# EAGLE board MOL-v1.8 (EAGLE 8.2.2)
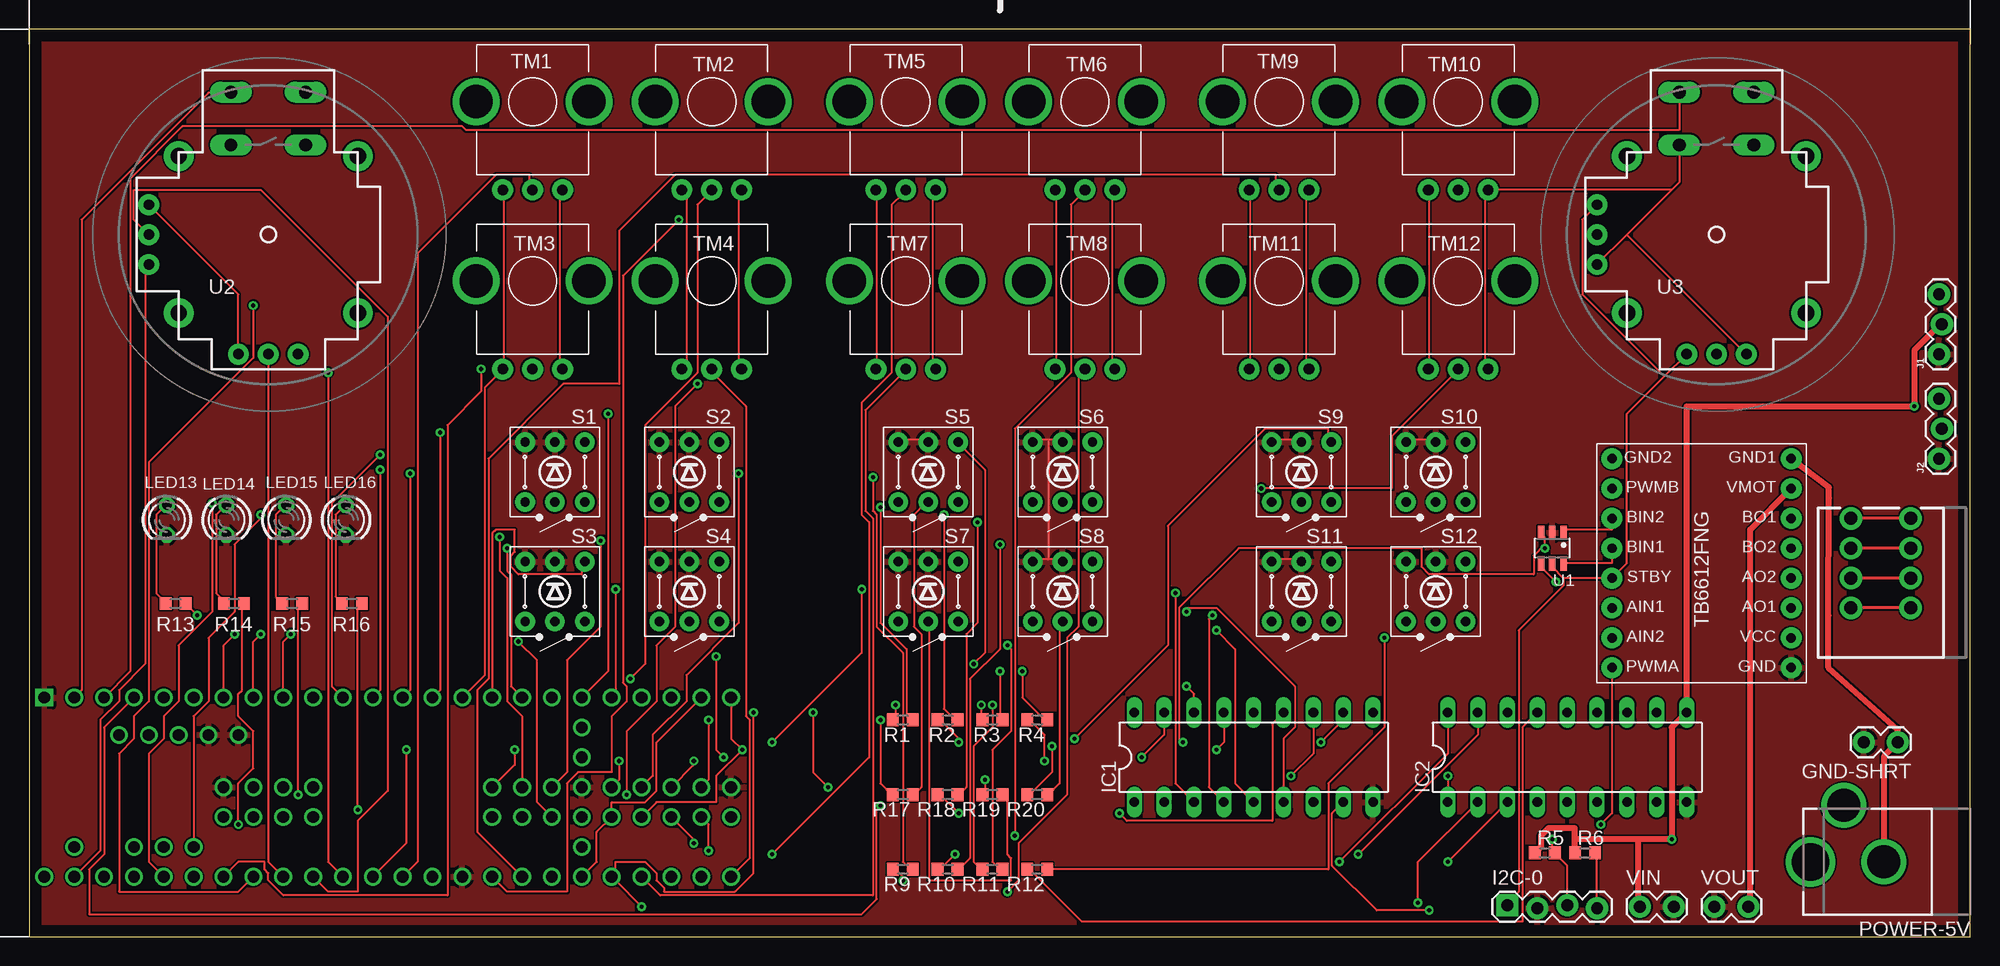
[diagram p0: board, top side]
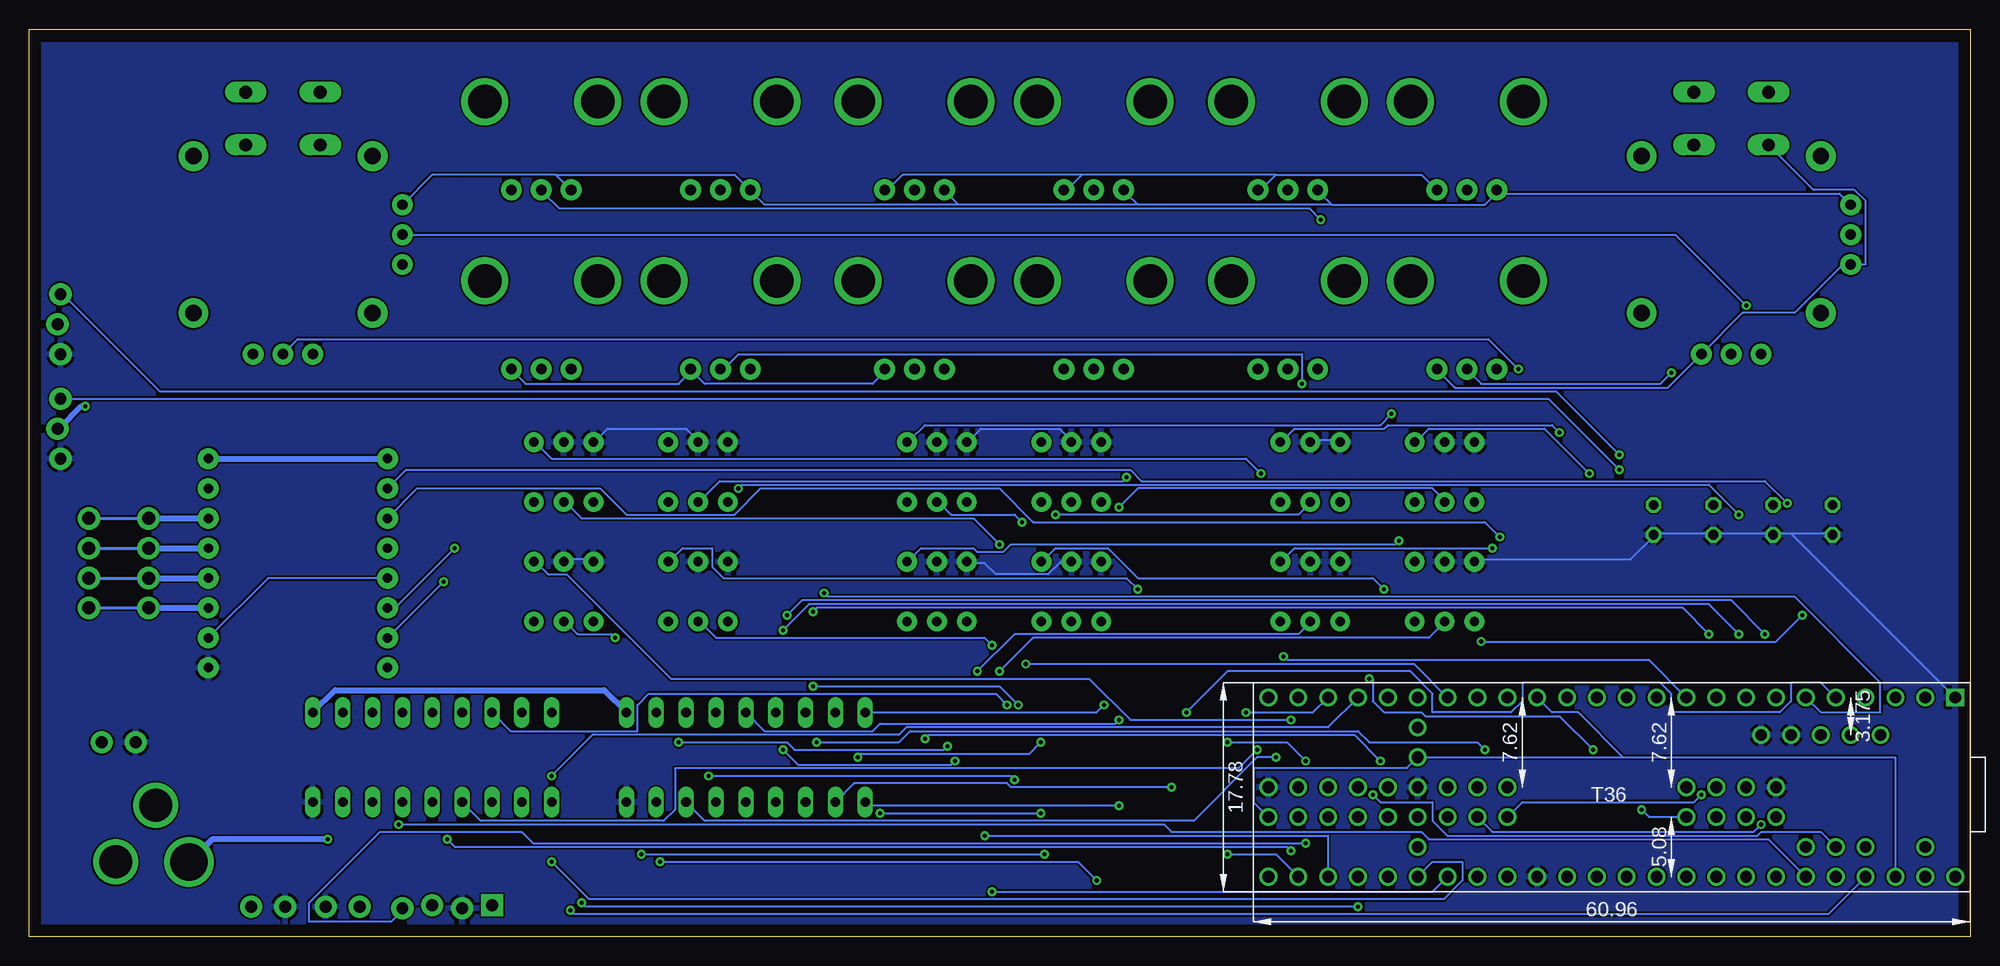
[diagram p1: board, bottom side, seen from below]

Size 165.08 x 77.14 mm. Coordinates in mm from the lower left corner, seen from the top.
Outline: 0,0 165.08,0 165.08,77.14 0,77.14 0,0
Copper layers (1*16): Top 0.035mm / dielectric 1.5mm / Bottom 0.035mm
Design rules "default": minimum track width 6mil, minimum drill 0.35mm, track to track 6mil, track to pad 6mil, pad to pad 6mil, via to via 6mil, smd to smd 6mil, copper to edge 40mil, drill to drill 6mil, minimum pad ring 10mil, minimum via ring 8mil, stop-mask expansion 4mil, vias tented up to drill 0mil, thermal gap 10mil
Net classes: 2 Power: width 0.508 mm, clearance 0.152 mm

## Footprints (pad centres in the part's own frame; a part is rotated, then mirrored left to right if it is on the bottom)
1X02_LOCK = drill 1.016 pad 1.88: 1 -0.178,0; 2 2.718,0
1X04_LOCK = drill 1.016 pad 1.88 square: 1 0,0.127 | drill 1.016 pad 1.88: 2 2.54,-0.127; 3 5.08,0.127; 4 7.62,-0.127
DIL18 = drill 0.813 long: 1 -10.16,-3.81; 2 -7.62,-3.81; 3 -5.08,-3.81; 4 -2.54,-3.81; 5 0,-3.81; 6 2.54,-3.81; 7 5.08,-3.81; 8 7.62,-3.81; 9 10.16,-3.81; 10 10.16,3.81; 11 7.62,3.81; 12 5.08,3.81; 13 2.54,3.81; 14 0,3.81; 15 -2.54,3.81; 16 -5.08,3.81; 17 -7.62,3.81; 18 -10.16,3.81
1X03_LOCK = drill 1.016 pad 1.88: 1 0,0.127; 2 2.54,-0.127; 3 5.08,0.127
LED3MM = drill 0.813 octagon: A -1.27,0; K 1.27,0
SPRINGTERMINAL-2.54MM-4 = drill 1.1 pad 1.9: 1 7.62,-2.54; 2 5.08,-2.54; 3 2.54,-2.54; 4 0,-2.54; P$1 7.62,2.54; P$2 5.08,2.54; P$3 2.54,2.54; P$4 0,2.54
DCJACK_2MM_PTH = drill 2.8: GND 0,7.35; GNDBREAK 4.8,10.75 | drill 3.2: PWR 0,13.6
R0603 = smd 1 x 1.1: 1 -0.85,0; 2 0.85,0
TR2-SWITCH-MOMENTARY-LED = drill 0.8 pad 1.676: 1 2.54,-2.54; 2 2.54,2.54; 3 -2.54,-2.54; 4 -2.54,2.54; A 0,2.54; C 0,-2.54
TRIM-PCB-9MM = drill 0.9 pad 1.778: 1 -2.54,-7.5; 2 0,-7.5; 3 2.54,-7.5 | drill 2.845 pad 4: 5 -4.8,0; 6 -4.8,0; M1 -4.8,0; M2 4.8,0
SOT23-6 = smd 0.55 x 1.2: 1 -0.95,-1.3; 2 0,-1.3; 3 0.95,-1.3; 4 0.95,1.3; 5 0,1.3; 6 -0.95,1.3
JOYSTICK = drill 1.1 pad 1.778 long: B1A -3.175,12.12; B1B 3.175,12.12; B2A -3.175,7.62; B2B 3.175,7.62 | drill 0.889 pad 1.778: H1 -2.54,-10.16; H2 0,-10.16; H3 2.54,-10.16; V1 -10.16,2.54; V2 -10.16,0; V3 -10.16,-2.54 | drill 1.397 pad 2.54: MOUNT1 -7.62,6.668; MOUNT2 -7.62,-6.668; MOUNT3 7.62,-6.668; MOUNT4 7.62,6.668
T36 = drill 1: 0 -15.24,-5.08; 1 -12.7,-5.08; 2 -10.16,-5.08; 3 -7.62,-5.08; 3V3(1) 17.78,-5.08; 3V3(2) 27.94,0; 3V3(3) -12.7,10.16; 3V3(4) 40.64,5.08; 4 -5.08,-5.08; 5 -2.54,-5.08; 5V -11.43,-1.905; 6 0,-5.08; 7 2.54,-5.08; 8 5.08,-5.08; 9 7.62,-5.08; 10 10.16,-5.08; 11 12.7,-5.08; 12 15.24,-5.08; 13 15.24,10.16; 14 12.7,10.16; 15 10.16,10.16; 16 7.62,10.16; 17 5.08,10.16; 18 2.54,10.16; 19 0,10.16; 20 -2.54,10.16; 21 -5.08,10.16; 22 -7.62,10.16; 23 -10.16,10.16; 24 20.32,-5.08; 25 22.86,-5.08; 26 25.4,-5.08; 27 27.94,-5.08; 28 30.48,-5.08; 29 33.02,-5.08; 30 35.56,-5.08; 31 38.1,-5.08; 32 40.64,-5.08; 33 40.64,10.16; 34 38.1,10.16; 35 35.56,10.16; 36 33.02,10.16; 37 30.48,10.16; 38 27.94,10.16; 39 25.4,10.16; 40 20.32,2.54; 41 22.86,2.54; 42 25.4,2.54; 43 30.48,2.54; 44 33.02,2.54; 45 35.56,2.54; 46 38.1,2.54; 47 38.1,5.08; 48 35.56,5.08; 49 33.02,5.08; 50 30.48,5.08; 51 25.4,5.08; 52 22.86,5.08; 53 20.32,5.08; 54 5.08,5.08; 55 2.54,5.08; 56 0,5.08; 57 -2.54,5.08; A10 -7.62,7.62; A11 -5.08,7.62; AGND -15.24,10.16; AREF -10.16,7.62; D+ -6.35,-1.905; D- -8.89,-1.905; DAC0 22.86,10.16; DAC1 20.32,10.16; DC 2.54,2.54; DD 5.08,2.54; DE 0,2.54; G1 27.94,2.54; G2 17.78,10.16; G3 40.64,2.54; G4 -3.81,-1.905; G5 -1.27,-1.905; G6 -2.54,2.54; P 27.94,5.08; R 27.94,7.62; VBAT 27.94,-2.54; VIN -17.78,10.16; VUSB -15.24,7.62 | drill 1 square: G0 -17.78,-5.08
POLOLU_TB6612FNG = drill 0.8 pad 1.778: AIN1 7.62,3.81; AIN2 7.62,6.35; AO1 -7.62,3.81; AO2 -7.62,1.27; BIN1 7.62,-1.27; BIN2 7.62,-3.81; BO1 -7.62,-3.81; BO2 -7.62,-1.27; GND -7.62,8.89; GND1 -7.62,-8.89; GND2 7.62,-8.89; PWMA 7.62,8.89; PWMB 7.62,-6.35; STBY 7.62,1.27; VCC -7.62,6.35; VMOT -7.62,-6.35

## Placement (x,y rotation side)
GND-SHRT  [1X02_LOCK]  158.75,16.51 180 top
I2C-0  [1X04_LOCK]  125.73,2.54 0 top
IC1  ULN2803  [DIL18]  104.14,15.24 0 top
IC2  ULN2803  [DIL18]  130.81,15.24 0 top
J1  SERVO 1  [1X03_LOCK]  162.56,49.53 90 top
J2  SERVO 2  [1X03_LOCK]  162.56,40.64 90 top
LED13  [LED3MM]  11.68,35.43 270 top
LED14  [LED3MM]  16.76,35.43 270 top
LED15  [LED3MM]  21.84,35.43 270 top
LED16  [LED3MM]  26.92,35.43 270 top
MOTORS1  [SPRINGTERMINAL-2.54MM-4]  157.48,27.94 90 top
POWER-5V  [DCJACK_2MM_PTH]  165.1,6.35 90 top
R1  [R0603]  74.3,18.41 180 top
R2  [R0603]  78.11,18.41 180 top
R3  [R0603]  81.92,18.41 180 top
R4  [R0603]  85.72,18.41 180 top
R5  [R0603]  128.91,7.11 0 top
R6  [R0603]  132.33,7.11 0 top
R9  [R0603]  74.3,5.71 180 top
R10  [R0603]  78.11,5.71 180 top
R11  [R0603]  81.92,5.71 180 top
R12  [R0603]  85.72,5.71 180 top
R13  [R0603]  12.45,28.32 0 top
R14  [R0603]  17.4,28.32 0 top
R15  [R0603]  22.35,28.32 0 top
R16  [R0603]  27.43,28.32 0 top
R17  [R0603]  74.3,12.06 180 top
R18  [R0603]  78.11,12.06 180 top
R19  [R0603]  81.92,12.06 180 top
R20  [R0603]  85.72,12.06 180 top
S1  SW-LEDPTH  [TR2-SWITCH-MOMENTARY-LED]  44.7,39.5 180 top
S2  SW-LEDPTH  [TR2-SWITCH-MOMENTARY-LED]  56.13,39.5 180 top
S3  SW-LEDPTH  [TR2-SWITCH-MOMENTARY-LED]  44.7,29.34 180 top
S4  SW-LEDPTH  [TR2-SWITCH-MOMENTARY-LED]  56.13,29.34 180 top
S5  SW-LEDPTH  [TR2-SWITCH-MOMENTARY-LED]  76.45,39.5 180 top
S6  SW-LEDPTH  [TR2-SWITCH-MOMENTARY-LED]  87.88,39.5 180 top
S7  SW-LEDPTH  [TR2-SWITCH-MOMENTARY-LED]  76.45,29.34 180 top
S8  SW-LEDPTH  [TR2-SWITCH-MOMENTARY-LED]  87.88,29.34 180 top
S9  SW-LEDPTH  [TR2-SWITCH-MOMENTARY-LED]  108.2,39.5 180 top
S10  SW-LEDPTH  [TR2-SWITCH-MOMENTARY-LED]  119.63,39.5 180 top
S11  SW-LEDPTH  [TR2-SWITCH-MOMENTARY-LED]  108.2,29.34 180 top
S12  SW-LEDPTH  [TR2-SWITCH-MOMENTARY-LED]  119.63,29.34 180 top
TM1  [TRIM-PCB-9MM]  42.8,70.99 0 top
TM2  [TRIM-PCB-9MM]  58.04,70.99 0 top
TM3  [TRIM-PCB-9MM]  42.8,55.75 0 top
TM4  [TRIM-PCB-9MM]  58.04,55.75 0 top
TM5  [TRIM-PCB-9MM]  74.55,70.99 0 top
TM6  [TRIM-PCB-9MM]  89.79,70.99 0 top
TM7  [TRIM-PCB-9MM]  74.55,55.75 0 top
TM8  [TRIM-PCB-9MM]  89.79,55.75 0 top
TM9  [TRIM-PCB-9MM]  106.3,70.99 0 top
TM10  [TRIM-PCB-9MM]  121.54,70.99 0 top
TM11  [TRIM-PCB-9MM]  106.3,55.75 0 top
TM12  [TRIM-PCB-9MM]  121.54,55.75 0 top
U1  SN74LVC2G04DBV  [SOT23-6]  129.54,33.02 180 top
U2  JOYSTICKPTH  [JOYSTICK]  20.32,59.69 0 top
U3  JOYSTICKPTH  [JOYSTICK]  143.51,59.69 0 top
U$1  TEENSY3_6--ALLPINS  [T36]  19.05,15.24 180 bottom
U$7  POLOLU_TB6612FNG  [POLOLU_TB6612FNG]  142.24,31.75 180 top
VIN  [1X02_LOCK]  137.16,2.54 0 top
VOUT  [1X02_LOCK]  143.51,2.54 0 top

## Library data of the parts
GND-SHRT I2C-0 MOTORS1 R1-R6 R9-R20 U$7 VIN VOUT = CMU-ArtFab
IC1 IC2 = uln-udn
J1 J2 = SparkFun-Connectors
LED13-LED16 = led
POWER-5V U2 U3 = adafruit
S1-S12 TM1-TM12 = Daniel
U1 = 74LV
U$1 = Teensy_3_6

## Nets
+3V3: I2C-0.1 TM1.1 TM2.1 TM3.1 TM4.1 TM5.1 TM6.1 TM7.1 TM8.1 TM9.1 TM10.1 TM11.1 TM12.1 U1.5 U2.H1 U2.V1 U3.H1 U3.V1 U$1.3V3(1) U$1.3V3(2) U$1.3V3(3) U$1.3V3(4) U$7.STBY U$7.VCC
+5V [Power]: IC1.10 IC2.10 J1.2 J2.2 POWER-5V.PWR R5.1 R6.1 VIN.1
A1: TM1.2 U$1.14
A2: TM2.2 U$1.15
A3: TM3.2 U$1.16
A4: TM4.2 U$1.33
A5: TM5.2 U$1.34
A6: TM6.2 U$1.35
A7: TM7.2 U$1.36
A8: TM8.2 U$1.39
A9: TM9.2 U$1.DAC0
A10: TM10.2 U$1.DAC1
A11: TM11.2 U$1.A10
A12: TM12.2 U$1.A11
AGND: TM1.3 TM2.3 TM3.3 TM4.3 TM5.3 TM6.3 TM7.3 TM8.3 TM9.3 TM10.3 TM11.3 TM12.3 U2.B2A U2.H3 U2.V3 U3.B2A U3.H3 U3.V3 U$1.AGND
B1: S1.3 U$1.11
B2: S2.3 U$1.12
B3: S3.3 U$1.24
B4: S4.3 U$1.25
B5: S5.3 U$1.26
B6: S6.3 U$1.27
B7: S7.3 U$1.28
B8: S8.3 U$1.42
B9: S9.3 U$1.43
B10: S10.3 U$1.44
B11: S11.3 U$1.45
B12: S12.3 U$1.46
GND: GND-SHRT.2 I2C-0.2 IC1.9 IC2.9 J1.1 J2.1 LED13.K LED14.K LED15.K LED16.K S1.1 S1.C S2.1 S2.C S3.1 S3.C S4.1 S4.C S5.1 S5.C S6.1 S6.C S7.1 S7.C S8.1 S8.C S9.1 S9.C S10.1 S10.C S11.1 S11.C S12.1 S12.C U1.2 U$1.G0 U$1.G1 U$1.G2 U$1.G3 U$1.G4 U$1.G5 U$1.G6 U$7.GND VIN.2 VOUT.1
GND_MOT [Power]: GND-SHRT.1 POWER-5V.GND U$7.GND1 U$7.GND2
GNDBREAK: POWER-5V.GNDBREAK
I2C_SCL: I2C-0.3 R5.2 U$1.47
I2C_SDA: I2C-0.4 R6.2 U$1.48
L1: IC1.1 U$1.2
L2: IC1.2 U$1.3
L3: IC1.3 U$1.4
L4: IC1.4 U$1.5
L5: IC1.5 U$1.6
L6: IC1.6 U$1.7
L7: IC1.7 U$1.8
L8: IC1.8 U$1.23
L9: IC2.1 U$1.29
L10: IC2.2 U$1.30 U$1.37
L11: IC2.3 U$1.31 U$1.38 U$1.50
L12: IC2.4 U$1.32 U$1.49
L13: IC2.5
L14: IC2.6
L15: IC2.7
L16: IC2.8
LED1: IC1.18 R1.2
LED2: IC1.17 R2.2
LED3: IC1.16 R3.2
LED4: IC1.15 R4.2
LED5: IC1.14 R17.2
LED6: IC1.13 R18.2
LED7: IC1.12 R19.2
LED8: IC1.11 R20.2
LED9: IC2.18 R9.2
LED10: IC2.17 R10.2
LED11: IC2.16 R11.2
LED12: IC2.15 R12.2
LED13: IC2.14
LED14: IC2.13
LED15: IC2.12
LED16: IC2.11
M_AIN: U1.3 U$1.40 U$7.AIN1
M_BIN: U1.1 U$1.41 U$7.BIN2
M_JOYB: U2.B1A U$1.0
M_JOYH: U2.H2 U$1.18
M_JOYV: U2.V2 U$1.17
M_PWMA: U$1.21 U$7.PWMA
M_PWMB: U$1.22 U$7.PWMB
N$1: R1.1 S1.A
N$2: LED13.A R13.1
N$3: LED14.A R14.1
N$4: LED15.A R15.1
N$5: U1.6 U$7.BIN1
N$6: U1.4 U$7.AIN2
N$7: LED16.A R16.1
N$8: R2.1 S2.A
N$9: R3.1 S3.A
N$10: R4.1 S4.A
N$15: R9.1 S9.A
N$16: R10.1 S10.A
N$17: R11.1 S11.A
N$18: R12.1 S12.A
N$19: R17.1 S5.A
N$20: R18.1 S6.A
N$21: R19.1 S7.A
N$22: R20.1 S8.A
N$45 [Power]: MOTORS1.P$1 U$7.BO1
N$46 [Power]: MOTORS1.P$2 U$7.BO2
N$52 [Power]: MOTORS1.P$3 U$7.AO2
N$54 [Power]: MOTORS1.P$4 U$7.AO1
S1: J1.3 U$1.9
S2: J2.3 U$1.10
S_JOYB: U3.B1A U$1.1
S_JOYH: U3.H2 U$1.20
S_JOYV: U3.V2 U$1.19
U1: R13.2 U$1.51
U2: R14.2 U$1.52
U3: R15.2 U$1.53
U4: R16.2 U$1.54
VMOT [Power]: U$7.VMOT VOUT.2

## Tracks (layer width: path | path; a pad name or v marks a point on that pad's centre or on a via)
+3V3
  Top 0.152: 130.49,30.48 129.54,31.43 U1.5 | 130.49,30.48 U$7.STBY 135.89,31.75 135.89,44.45 139.06,47.62 | 139.06,47.62 U3.H1 | 130.49,30.48 130.49,29.84 126.68,26.04 126.68,3.81 125.73,2.86 I2C-0.1 | TM11.1 103.82,48.26 103.82,63.18 TM9.1 | TM12.1 119.06,48.26 119.06,63.18 TM10.1 | U2.V1 17.78,54.61 U2.H1 | TM8.1 87.31,48.26 87.31,63.18 TM6.1 | TM7.1 72.07,48.26 72.07,63.18 TM5.1 | TM1.1 40.32,63.18 40.32,48.26 TM3.1 40.01,47.94 38.73,46.67 38.73,22.23 U$1.3V3(1) | TM4.1 55.56,48.26 55.88,48.58 55.88,62.87 55.56,63.18 TM2.1 | 139.06,47.62 132.08,54.61 132.08,60.96 U3.V1
  Bottom 0.152: U$7.VCC 144.78,30.48 U$7.STBY | U$1.3V3(3) 6.35,15.24 29.53,15.24 | 29.53,15.24 U$1.3V3(2) 47.94,14.29 60.96,14.29 60.96,11.43 U$1.3V3(4) | U$1.3V3(1) 35.56,19.05 33.34,19.05 29.53,15.24 | U3.V1 130.81,64.77 120.33,64.77 | 120.33,64.77 119.06,63.5 TM10.1 | 120.33,64.77 105.09,64.77 103.82,63.5 TM9.1 103.5,63.18 102.55,62.23 86.04,62.23 | 54.29,62.23 41.27,62.23 40.32,63.18 TM1.1 40.01,63.18 11.11,63.18 U2.V1 | 54.29,62.23 55.24,63.18 TM2.1 | 70.8,62.23 71.75,63.18 TM5.1 | 54.29,62.23 70.8,62.23 | 86.04,62.23 87,63.18 TM6.1 | 70.8,62.23 86.04,62.23
+5V  (via drill 0.35)
  Top 0.508: 131.44,8.26 131.44,7.3 R6.1 | 131.44,8.26 131.44,9.21 129.22,9.21 128.59,8.57 128.59,7.62 128.27,7.3 R5.1 | 136.84,8.26 131.44,8.26 | 136.84,8.26 136.84,2.54 VIN.1 | J1.2 162.56,52.07 160.34,49.85 v160.34,45.09 140.97,45.09 IC2.10 139.7,17.78 v139.7,8.26 136.84,8.26
  Bottom 0.508: v160.34,45.09 160.66,45.09 162.56,43.18 J2.2 | IC1.10 116.2,20.95 139.06,20.95 IC2.10 | v139.7,8.26 149.54,8.26 151.45,6.35 POWER-5V.PWR
A1
  Top 0.152: U$1.14 33.02,6.35 33.02,58.1 39.69,64.77 42.55,64.77 42.55,63.5 TM1.2
A2  (via drill 0.35)
  Top 0.152: U$1.15 32.07,7.94 v32.07,15.88 | v51.12,21.91 52.39,23.18 52.39,43.5 56.83,47.94 56.83,62.23 57.78,63.18 TM2.2
  Bottom 0.152: v32.07,15.88 34.92,18.73 46.35,18.73 46.67,19.05 49.85,19.05 50.8,20 50.8,21.91 v51.12,21.91
A3  (via drill 0.35)
  Top 0.152: U$1.16 25.4,6.35 v25.4,47.94
  Bottom 0.152: v25.4,47.94 26.35,46.99 41.59,46.99 42.55,47.94 TM3.2
A4
  Top 0.152: U$1.33 61.28,6.67 61.28,18.41 60.96,18.73 60.96,45.09 58.1,47.94 TM4.2
A5  (via drill 0.35)
  Top 0.152: v63.18,6.99 71.44,15.24 71.44,35.24 70.8,35.88 70.8,45.4 73.34,47.94 73.34,62.23 74.3,63.18 TM5.2
  Bottom 0.152: U$1.34 59.05,6.99 v63.18,6.99
A6  (via drill 0.35)
  Top 0.152: v83.82,8.57 83.82,43.18 88.58,47.94 88.58,62.23 89.53,63.18 TM6.2
  Bottom 0.152: U$1.35 54.61,8.57 v83.82,8.57
A7
  Top 0.152: U$1.36 53.66,3.49 71.75,3.49 71.75,35.56 71.12,36.2 71.12,44.77 74.3,47.94 TM7.2
A8  (via drill 0.35)
  Top 0.152: v83.19,3.81 84.14,4.76 84.14,7.94 88.27,12.06 88.27,25.4 89.22,26.35 89.22,47.62 89.53,47.94 TM8.2
  Bottom 0.152: U$1.39 45.72,3.81 v83.19,3.81
A9
  Top 0.152: U$1.DAC0 38.1,8.89 38.1,20.95 39.05,21.91 39.05,40.64 45.4,46.99 50.16,46.99 50.16,60.01 54.93,64.77 106.05,64.77 106.05,63.5 TM9.2
A10  (via drill 0.35)
  Top 0.152: U$1.DAC1 40.64,3.81 45.72,3.81 45.72,13.02 46.67,13.97 49.53,13.97 49.53,18.73 50.8,20 50.8,21.27 50.48,21.59 50.48,56.2 v55.24,60.96
  Bottom 0.152: v55.24,60.96 56.2,61.91 120.02,61.91 121.28,63.18 TM10.2
A11  (via drill 0.35)
  Top 0.152: v50.8,12.06 50.8,17.46 53.34,20 53.34,24.77 54.93,26.35 54.93,45.09 v56.83,46.99
  Bottom 0.152: U$1.A10 12.7,8.89 17.78,8.89 18.1,8.57 44.45,8.57 45.72,9.84 45.72,11.43 50.16,11.43 v50.8,12.06 | v56.83,46.99 56.83,49.53 104.78,49.53 106.05,48.26 TM11.2
A12  (via drill 0.35)
  Top 0.152: U$1.A11 13.97,18.73 15.24,20 15.24,25.4 17.46,27.62 17.46,33.34 19.68,35.56 v19.68,35.88 | v104.78,38.1 115.89,38.1 115.89,42.55 121.28,47.94 TM12.2
  Bottom 0.152: v19.68,35.88 22.23,38.42 104.46,38.42 v104.78,38.1
AGND
  Top 0.152: U$1.AGND 6.03,7.3 6.03,18.41 7.62,20 7.62,20.95 9.84,23.18 9.84,56.83 U2.V3 | TM11.3 108.58,48.26 108.58,63.18 TM9.3 | TM12.3 123.83,48.26 123.83,63.18 TM10.3 124.14,63.5 139.7,63.5 | 139.7,63.5 140.34,64.14 U3.B2A | 139.7,63.5 135.89,59.69 | 135.89,59.69 U3.V3 | 135.89,59.69 U3.H3 | TM8.3 92.08,48.26 92.08,63.18 TM6.3 | TM7.3 76.83,48.26 76.83,63.18 TM5.3 | TM3.3 45.09,48.26 45.09,63.18 TM1.3 | TM4.3 60.33,48.26 60.33,63.18 TM2.3
  Bottom 0.152: U2.B2A 13.34,63.5 9.84,63.5 8.89,62.55 8.89,57.15 U2.V3 10.79,57.15 14.92,53.02 19.37,53.02 U2.H3 25.72,46.67 43.81,46.67 45.09,47.94 TM3.3 | TM12.3 123.83,47.94 122.87,46.99 109.86,46.99 108.9,47.94 TM11.3 108.58,47.94 107.63,46.99 93.34,46.99 92.39,47.94 TM8.3 | 59.05,64.77 46.67,64.77 45.4,63.5 TM1.3 | 59.05,64.77 60.33,63.5 TM2.3 | 75.56,64.77 76.83,63.5 TM5.3 | 59.05,64.77 75.56,64.77 | 75.56,64.77 90.81,64.77 92.08,63.5 TM6.3
B1  (via drill 0.35)
  Top 0.152: U$1.11 32.38,20.95 v32.38,39.37
  Bottom 0.152: v32.38,39.37 36.2,43.18 46.04,43.18 46.99,42.23 S1.3
B2  (via drill 0.35)
  Top 0.152: U$1.12 34.92,20.95 v34.92,42.86
  Bottom 0.152: v34.92,42.86 35.56,43.5 49.53,43.5 49.85,43.18 57.47,43.18 58.42,42.23 S2.3
B3
  Top 0.152: U$1.24 39.37,34.29 39.69,34.61 41.27,34.61 41.27,32.7 40.96,32.38 40.96,31.43 41.59,30.8 46.99,30.8 46.99,31.75 S3.3
B4  (via drill 0.35)
  Top 0.152: U$1.25 40.96,21.27 40.96,30.8 40.64,31.11 v40.64,33.02
  Bottom 0.152: v40.64,33.02 57.47,33.02 58.42,32.07 S4.3
B5  (via drill 0.35)
  Top 0.152: v80.33,23.18 81.28,24.13 81.28,39.69 79.06,41.91 S5.3
  Bottom 0.152: U$1.26 47.31,23.18 v80.33,23.18
B6  (via drill 0.35)
  Top 0.152: U$1.27 49.21,22.54 v49.21,44.45
  Bottom 0.152: v49.21,44.45 50.16,43.5 88.9,43.5 90.17,42.23 S6.3
B7  (via drill 0.35)
  Top 0.152: U$1.28 49.85,20.64 v49.85,29.53
  Bottom 0.152: v49.85,29.53 50.8,30.48 70.8,30.48 73.34,33.02 77.79,33.02 78.74,32.07 S7.3
B8  (via drill 0.35)
  Top 0.152: U$1.42 45.72,13.97 45.72,23.5 48.58,26.35 v48.58,33.66
  Bottom 0.152: v48.58,33.66 48.9,33.34 81.6,33.34 82.23,32.7 84.45,32.7 84.77,33.02 89.22,33.02 90.17,32.07 S8.3
B9  (via drill 0.35)
  Top 0.152: U$1.43 50.16,13.34 v50.16,14.92 | v88.9,16.83 96.84,24.77 96.84,34.92 105.09,43.18 110.49,43.18 110.49,42.23 S9.3
  Bottom 0.152: v50.16,14.92 52.39,17.14 88.58,17.14 v88.9,16.83
B10  (via drill 0.35)
  Top 0.152: U$1.44 53.02,13.65 53.02,17.14 55.88,20 55.88,22.23 60.33,26.67 v60.33,39.37
  Bottom 0.152: v60.33,39.37 61.59,40.64 120.65,40.64 121.92,41.91 S10.3
B11  (via drill 0.35)
  Top 0.152: U$1.45 56.52,14.61 v56.52,14.92 | v63.18,16.51 70.8,24.13 v70.8,29.53
  Bottom 0.152: v56.52,14.92 58.1,16.51 v63.18,16.51 | v70.8,29.53 71.75,30.48 106.05,30.48 107,31.43 107,33.02 109.54,33.02 110.49,32.07 S11.3
B12  (via drill 0.35)
  Top 0.152: U$1.46 57.78,13.34 v57.78,18.41
  Bottom 0.152: v57.78,18.41 71.44,18.41 74.93,21.91 110.49,21.91 119.38,30.8 120.97,30.8 121.92,31.75 S12.3
GND
  Top 0.152: S9.1 105.73,42.23 107.95,42.23 S9.C | S10.1 117.16,42.23 119.38,42.23 S10.C | 129.54,34.61 U1.2 | S11.1 105.73,32.07 107.95,32.07 S11.C | 86.68,32.07 87.63,32.07 S8.C | 86.68,32.07 85.41,32.07 S8.1 | S5.1 73.98,42.23 76.2,42.23 S5.C | 86.68,42.23 87.63,42.23 S6.C | 86.68,42.23 85.41,42.23 S6.1 | 86.68,42.23 86.68,32.07
  Bottom 0.152: S9.C 108.27,42.23 109.22,43.18 115.89,43.18 116.84,42.23 S10.1 | S12.C 119.38,32.07 117.16,32.07 S12.1 | 73.98,32.07 S7.1 | 76.2,32.07 S7.C | 85.27,31.84 85.09,31.75 | 85.27,31.84 S8.1 | S5.C 76.52,42.23 77.47,43.18 84.14,43.18 85.09,42.23 S6.1 | 15.24,34.29 16.51,34.29 LED14.K 16.83,34.29 21.59,34.29 LED15.K 21.91,34.29 26.67,34.29 LED16.K 26.99,33.97 28.89,32.07 41.91,32.07 S3.1 | 15.24,34.29 11.75,34.29 LED13.K | S2.1 53.66,42.23 55.88,42.23 S2.C | 15.24,34.29 U$1.G0 | 105.41,31.75 S11.1 | 77.34,31.88 78.44,30.79 82.86,30.79 83.82,31.75 85.18,31.75 85.27,31.84
  pour Top: 0,0 165.1,0 165.1,76.2 0,76.2
  pour Bottom: 0,76.2 166.37,76.2 166.37,-2.54 0,-2.54
GND_MOT
  Top 0.508: 157.8,13.97 157.8,6.35 POWER-5V.GND | 157.8,13.97 157.8,14.29 | U$7.GND1 153.08,38.19 153.08,37.28 153.03,27.29 153.03,22.86 158.93,17.6 GND-SHRT.1 157.8,15.38 157.8,13.97
  Bottom 0.508: U$7.GND1 U$7.GND2
I2C_SCL  (via drill 0.35)
  Top 0.152: I2C-0.3 130.81,6.03 129.86,6.99 R5.2 129.54,7.3 v129.54,8.26 | U$1.47 57.78,9.53 v57.78,7.3
  Bottom 0.152: v57.78,7.3 58.1,7.62 128.91,7.62 v129.54,8.26
I2C_SDA  (via drill 0.35)
  Top 0.152: I2C-0.4 133.35,6.99 R6.2 | U$1.48 56.52,8.26 v56.52,7.94
  Bottom 0.152: v56.52,7.94 122.24,7.94 123.19,8.89 135.25,8.89 141.29,2.86 141.29,1.27 134.3,1.27 133.35,2.22 I2C-0.4
L1  (via drill 0.35)
  Top 0.152: v72.39,11.11 72.07,10.79 72.07,3.17 70.8,1.91 5.08,1.91 5.08,5.71 6.35,6.99 6.35,17.78 U$1.2
  Bottom 0.152: IC1.1 93.66,11.11 v72.39,11.11
L2  (via drill 0.35)
  Top 0.152: v67.94,12.7 66.67,13.97 v66.67,19.05
  Bottom 0.152: IC1.2 94.93,13.02 81.92,13.02 81.6,12.7 v67.94,12.7 | v66.67,19.05 63.18,22.54 47.62,22.54 45.72,20.64 45.72,19.05 39.05,19.05 38.1,20 38.1,21.59 26.35,21.59 25.4,20.64 25.4,19.05 16.19,19.05 15.24,20 15.24,21.59 12.7,21.59 U$1.3
L3  (via drill 0.35)
  Top 0.152: IC1.3 97.47,13.02 v97.47,29.21
  Bottom 0.152: v97.47,29.21 97.16,28.89 14.92,28.89 7.62,21.59 7.62,19.05 12.7,19.05 U$1.4
L4  (via drill 0.35)
  Top 0.152: IC1.4 100.33,12.7 100.33,26.99 v100.65,27.3 | v17.46,25.72 16.51,24.77 U$1.5
  Bottom 0.152: v100.65,27.3 99.38,28.57 20.32,28.57 v17.46,25.72
L5  (via drill 0.35)
  Top 0.152: IC1.5 102.55,13.02 102.55,24.45 v100.97,26.04 | v19.68,25.72 19.05,25.08 U$1.6
  Bottom 0.152: v100.97,26.04 98.74,28.26 22.23,28.26 v19.68,25.72
L6  (via drill 0.35)
  Top 0.152: IC1.6 106.68,16.83 107.63,17.78 107.63,21.27 100.97,27.94 98.42,27.94 v98.42,27.62 | v22.23,25.72 21.59,25.08 U$1.7
  Bottom 0.152: v98.42,27.62 98.11,27.94 24.45,27.94 v22.23,25.72
L7  (via drill 0.35)
  Top 0.152: v59.05,15.24 58.42,15.88 v58.42,23.81
  Bottom 0.152: IC1.7 107.63,9.84 66.04,9.84 60.64,15.24 v59.05,15.24 | v58.42,23.81 58.1,23.5 27.3,23.5 U$1.8
L8  (via drill 0.35)
  Top 0.152: IC1.8 110.81,10.48 110.81,6.03 114.62,2.22 v119.06,2.22
  Bottom 0.152: v119.06,2.22 118.75,1.91 12.06,1.91 U$1.23
L9  (via drill 0.35)
  Top 0.152: v120.65,13.65 IC2.1
  Bottom 0.152: v120.65,13.65 117.16,17.14 91.12,17.14 90.49,17.78 54.61,17.78 U$1.29
L10  (via drill 0.35)
  Top 0.152: IC2.2 118.11,6.35 v118.11,2.86 | 49.85,4.76 v52.07,2.54 | v61.59,19.05 61.59,5.4 60.01,3.81 53.98,3.81 53.98,4.13 53.34,4.76 53.34,5.4 52.39,6.35 49.85,6.35 49.85,4.76 | 49.85,4.76 U$1.37
  Bottom 0.152: v118.11,2.86 117.79,2.54 v52.07,2.54 | U$1.30 55.88,19.05 v61.59,19.05
L11  (via drill 0.35)
  Top 0.152: v120.65,6.35 IC2.3 | U$1.38 48.26,6.35 48.26,8.89 U$1.50 49.53,11.43 52.39,11.43 53.34,12.38 53.34,16.51 U$1.31
  Bottom 0.152: v120.65,6.35 117.47,3.17 44.77,3.17 43.18,4.76 43.18,6.35 45.72,6.35 U$1.38
L12  (via drill 0.35)
  Top 0.152: U$1.32 59.69,16.83 v60.64,15.88 58.42,13.65 58.42,11.43 53.34,11.43 U$1.49
  Bottom 0.152: IC2.4 126.68,9.84 111.12,9.84 110.17,10.79 110.17,14.29 62.23,14.29 v60.64,15.88
LED1  (via drill 0.35)
  Top 0.152: v73.66,19.68 73.66,18.41 R1.2
  Bottom 0.152: v73.66,19.68 74.3,19.05 IC1.18
LED2  (via drill 0.35)
  Top 0.152: v79.06,16.51 79.06,16.83 77.47,18.41 R2.2 | v94.61,15.24 96.52,17.14 IC1.17
  Bottom 0.152: v79.06,16.51 80.01,15.56 94.3,15.56 v94.61,15.24
LED3  (via drill 0.35)
  Top 0.152: v80.96,19.68 80.96,18.41 R3.2 | v98.42,21.27 99.06,20.64 IC1.16
  Bottom 0.152: v80.96,19.68 82.55,21.27 v98.42,21.27
LED4  (via drill 0.35)
  Top 0.152: v86.36,14.92 86.36,17.14 85.09,18.41 R4.2 | v100.97,15.88 101.6,16.51 IC1.15
  Bottom 0.152: v86.36,14.92 86.68,14.61 99.69,14.61 v100.97,15.88
LED5  (via drill 0.35)
  Top 0.152: v72.39,18.41 72.39,13.02 73.34,12.06 R17.2
  Bottom 0.152: v72.39,18.41 72.71,18.1 92.71,18.1 93.34,17.46 102.55,17.46 IC1.14
LED6  (via drill 0.35)
  Top 0.152: v79.06,10.48 77.47,12.06 R18.2 | v92.71,10.48 93.34,9.84 105.73,9.84 105.73,18.1 IC1.13
  Bottom 0.152: v92.71,10.48 v79.06,10.48
LED7  (via drill 0.35)
  Top 0.152: v81.28,13.34 81.28,12.06 R19.2 | v107.31,13.65 109.22,15.56 IC1.12
  Bottom 0.152: v81.28,13.34 81.6,13.65 v107.31,13.65
LED8  (via drill 0.35)
  Top 0.152: v87,16.19 87,13.97 85.09,12.06 R20.2 | v109.86,16.51 111.76,18.41 IC1.11
  Bottom 0.152: v87,16.19 87.31,15.88 100.01,15.88 100.65,16.51 v109.86,16.51
LED9  (via drill 0.35)
  Top 0.152: v74.3,4.76 74.3,5.08 73.66,5.71 R9.2 | v111.44,6.35 120.65,15.56 IC2.18
  Bottom 0.152: v74.3,4.76 75.88,6.35 v111.44,6.35
LED10  (via drill 0.35)
  Top 0.152: v78.74,6.99 77.47,5.71 R10.2 | v113.03,6.99 123.19,17.14 IC2.17
  Bottom 0.152: v113.03,6.99 v78.74,6.99
LED11  (via drill 0.35)
  Top 0.152: v81.92,19.68 81.92,17.78 80.33,16.19 80.33,6.35 80.96,5.71 R11.2
  Bottom 0.152: v81.92,19.68 82.87,20.64 112.39,20.64 113.35,19.68 113.35,17.46 124.14,17.46 IC2.16
LED12
  Top 0.152: IC2.15 127,17.78 127,1.27 89.53,1.27 85.09,5.71 R12.2
M_AIN  (via drill 0.35)
  Top 0.152: 128.91,33.34 128.91,33.97 128.59,34.29 U1.3 | U$1.40 41.27,14.61 v41.27,15.88 | v98.11,16.51 97.79,16.83 97.79,27.94 102.87,33.02 118.43,33.02 118.43,31.43 119.06,30.8 127.95,30.8 127.95,32.38 128.91,33.34 | 128.91,33.34 v128.91,33.02
  Bottom 0.152: v128.91,33.02 133.99,27.94 U$7.AIN1 | v41.27,15.88 41.91,16.51 51.12,16.51 52.07,17.46 90.17,17.46 91.12,16.51 v98.11,16.51
M_BIN  (via drill 0.35)
  Top 0.152: U$7.BIN2 134.62,34.61 130.49,34.61 U1.1 | U$1.41 41.91,18.73 40.64,20 40.64,30.48 40.01,31.11 v40.01,33.97
  Bottom 0.152: v40.01,33.97 41.27,35.24 79.69,35.24 82.55,38.1 102.87,38.1 105.09,35.88 114.3,35.88 116.52,38.1 132.08,38.1 U$7.BIN2
M_JOYB
  Top 0.152: U$1.0 4.45,20.95 4.45,60.96 15.24,71.75 17.14,71.75 U2.B1A
M_JOYH
  Top 0.152: U$1.18 20.32,6.35 U2.H2
M_JOYV
  Top 0.152: U$1.17 25.4,3.81 27.94,3.81 27.94,9.84 30.48,12.38 30.48,52.7 19.68,63.5 8.89,63.5 8.89,60.96 U2.V2
M_PWMA  (via drill 0.35)
  Top 0.152: v133.67,9.53 134.62,10.48 U$7.PWMA
  Bottom 0.152: U$1.21 17.14,8.26 46.04,8.26 46.67,8.89 67.94,8.89 68.58,9.53 v133.67,9.53
M_PWMB  (via drill 0.35)
  Top 0.152: U$1.22 10.16,6.35 10.16,15.56 11.43,16.83 11.43,18.73 12.7,20 12.7,24.77 15.56,27.62 v15.56,36.83
  Bottom 0.152: v15.56,36.83 17.46,38.73 70.48,38.73 71.44,39.69 133.03,39.69 U$7.PWMB
N$1  (via drill 0.35)
  Top 0.152: v72.39,36.51 72.39,26.67 74.61,24.45 74.61,18.73 74.93,18.41 R1.1
  Bottom 0.152: v72.39,36.51 70.8,38.1 45.72,38.1 44.77,37.15 S1.A
N$2
  Top 0.152: R13.1 11.43,28.57 10.79,29.21 10.79,35.88 11.43,36.51 LED13.A
N$3
  Top 0.152: R14.1 16.51,28.57 15.88,29.21 15.88,35.88 16.51,36.51 LED14.A
N$4
  Top 0.152: R15.1 21.27,28.57 20.95,28.89 20.95,35.88 21.59,36.51 LED15.A
N$5
  Top 0.152: U$7.BIN1 134.62,31.75 130.49,31.75 U1.6
N$6  (via drill 0.35)
  Top 0.152: v129.86,30.16 128.59,31.43 U1.4
  Bottom 0.152: U$7.AIN2 v129.86,30.16
N$7
  Top 0.152: R16.1 26.35,28.57 26.04,28.89 26.04,35.88 26.67,36.51 LED16.A
N$8  (via drill 0.35)
  Top 0.152: v77.79,35.88 77.79,19.37 78.74,18.41 R2.1
  Bottom 0.152: v77.79,35.88 57.15,35.88 56.2,36.83 S2.A
N$9  (via drill 0.35)
  Top 0.152: v82.55,22.54 82.55,18.41 R3.1
  Bottom 0.152: v82.55,22.54 79.69,25.4 46.04,25.4 44.77,26.67 S3.A
N$10  (via drill 0.35)
  Top 0.152: v84.45,22.54 84.45,20.32 86.36,18.41 R4.1
  Bottom 0.152: v84.45,22.54 81.28,25.72 57.15,25.72 56.2,26.67 S4.A
N$15  (via drill 0.35)
  Top 0.152: v71.75,39.05 71.75,36.2 72.07,35.88 72.07,26.35 74.3,24.13 74.3,6.35 74.93,5.71 R9.1
  Bottom 0.152: v71.75,39.05 72.07,38.73 106.36,38.73 107.95,37.15 S9.A
N$16  (via drill 0.35)
  Top 0.152: v82.55,33.34 82.55,24.45 80.01,21.91 80.01,6.67 79.06,5.71 R10.1
  Bottom 0.152: v82.55,33.34 84.77,35.56 118.11,35.56 119.38,36.83 S10.A
N$17  (via drill 0.35)
  Top 0.152: v83.19,24.77 83.5,24.45 83.5,17.46 81.92,15.88 81.92,6.35 82.55,5.71 R11.1
  Bottom 0.152: v83.19,24.77 83.82,25.4 106.68,25.4 107.95,26.67 S11.A
N$18  (via drill 0.35)
  Top 0.152: R12.1 110.49,5.71 110.49,13.02 115.25,17.78 v115.25,25.4
  Bottom 0.152: v115.25,25.4 115.57,25.72 118.43,25.72 119.38,26.67 S12.A
N$19
  Top 0.152: R17.1 75.25,12.06 75.88,12.7 75.88,25.72 75.25,26.35 75.25,35.88 76.2,36.83 S5.A
N$20  (via drill 0.35)
  Top 0.152: v80.64,35.24 80.64,26.67 79.69,25.72 79.69,12.7 79.06,12.06 R18.1
  Bottom 0.152: v80.64,35.24 81.28,35.88 86.68,35.88 87.63,36.83 S6.A
N$21
  Top 0.152: R19.1 82.87,12.06 83.19,11.75 83.19,6.99 83.5,6.67 83.5,4.76 76.52,4.76 76.52,26.67 S7.A
N$22
  Top 0.152: R20.1 86.68,12.06 87.63,13.02 87.63,26.67 S8.A
N$45
  Bottom 0.508: MOTORS1.P$1 U$7.BO1
N$46
  Bottom 0.508: MOTORS1.P$2 U$7.BO2
N$52
  Bottom 0.508: MOTORS1.P$3 U$7.AO2
N$54
  Bottom 0.508: MOTORS1.P$4 U$7.AO1
S1  (via drill 0.35)
  Top 0.152: U$1.9 25.72,21.27 25.72,36.83 v29.84,40.96
  Bottom 0.152: v29.84,40.96 35.24,46.35 153.99,46.35 162.24,54.61 J1.3
S2  (via drill 0.35)
  Top 0.152: U$1.10 29.84,20.95 v29.84,39.69
  Bottom 0.152: v29.84,39.69 35.88,45.72 J2.3
S_JOYB
  Top 0.152: U$1.1 8.57,22.54 8.57,64.45 13.02,68.9 36.83,68.9 37.15,68.58 140.34,68.58 U3.B1A
S_JOYH  (via drill 0.35)
  Top 0.152: U$1.20 17.78,6.35 20,6.35 20,5.71 20.32,5.4 20.32,4.76 21.59,3.49 35.56,3.49 35.56,43.5 38.42,46.35 v38.42,48.26
  Bottom 0.152: v38.42,48.26 40.96,50.8 142.24,50.8 U3.H2
S_JOYV  (via drill 0.35)
  Top 0.152: U$1.19 17.78,3.81 7.62,3.81 7.62,15.56 8.89,16.83 8.89,18.73 10.16,20 10.16,40.32 19.05,49.21 v19.05,53.66
  Bottom 0.152: v19.05,53.66 25.08,59.69 U3.V2
U1  (via drill 0.35)
  Top 0.152: v14.29,27.3 13.34,28.26 R13.2 | v41.59,25.08 43.18,23.5 43.18,11.43 U$1.51
  Bottom 0.152: v14.29,27.3 16.51,25.08 v41.59,25.08
U2  (via drill 0.35)
  Top 0.152: v17.78,9.53 17.78,13.02 19.05,14.29 19.05,17.46 17.78,18.73 17.78,20.64 18.1,20.95 18.1,28.26 R14.2
  Bottom 0.152: v17.78,9.53 18.41,8.89 40.64,8.89 U$1.52
U3  (via drill 0.35)
  Top 0.152: v22.86,12.06 22.86,27.94 23.18,28.26 R15.2
  Bottom 0.152: v22.86,12.06 23.5,11.43 38.1,11.43 U$1.53
U4  (via drill 0.35)
  Top 0.152: v27.94,10.79 27.94,27.94 28.26,28.26 R16.2
  Bottom 0.152: v27.94,10.79 27.3,10.16 U$1.54
VMOT
  Top 0.508: U$7.VMOT 146.37,34.61 146.37,2.54 VOUT.2

## Text on the board
Top: ***The TEENSY is on the BOTTOM side of the board; / / KNOBS and BUTTONS are on the TOP side of the board.